# EAGLE board relaxationoscillator-v1 (EAGLE 8.7.1)
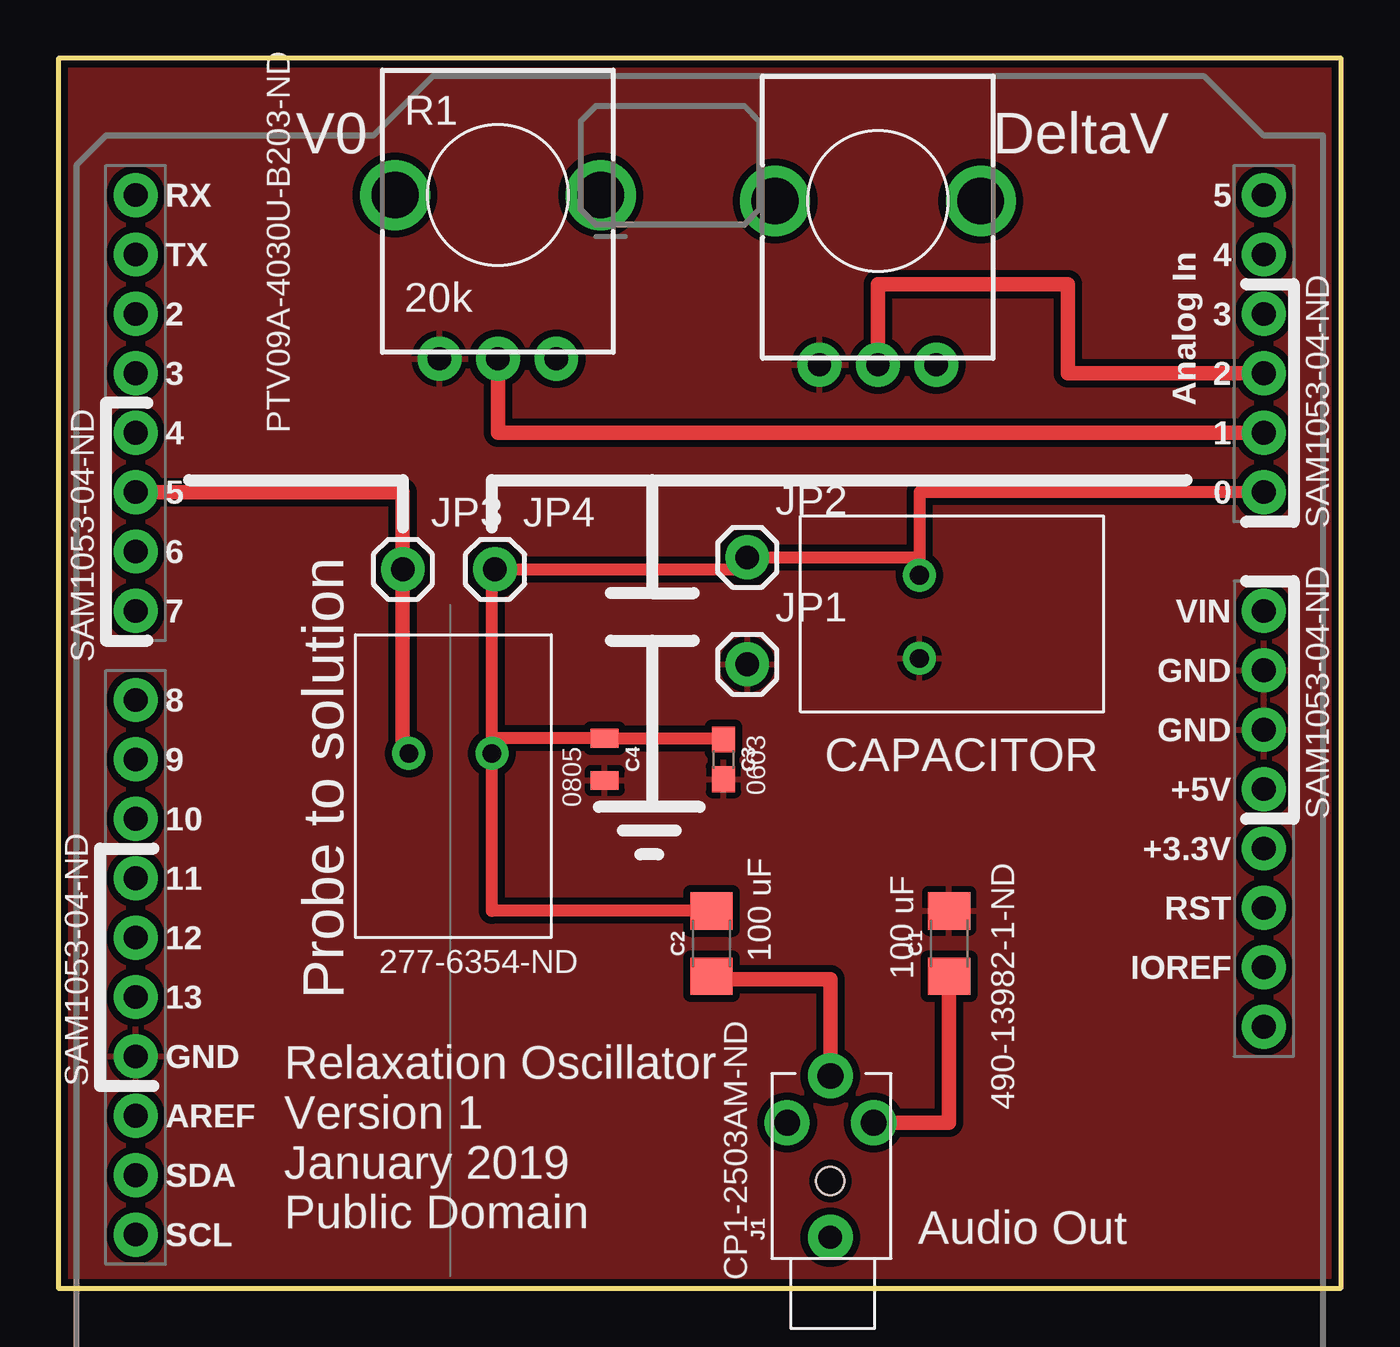
[diagram p0: board, top side]
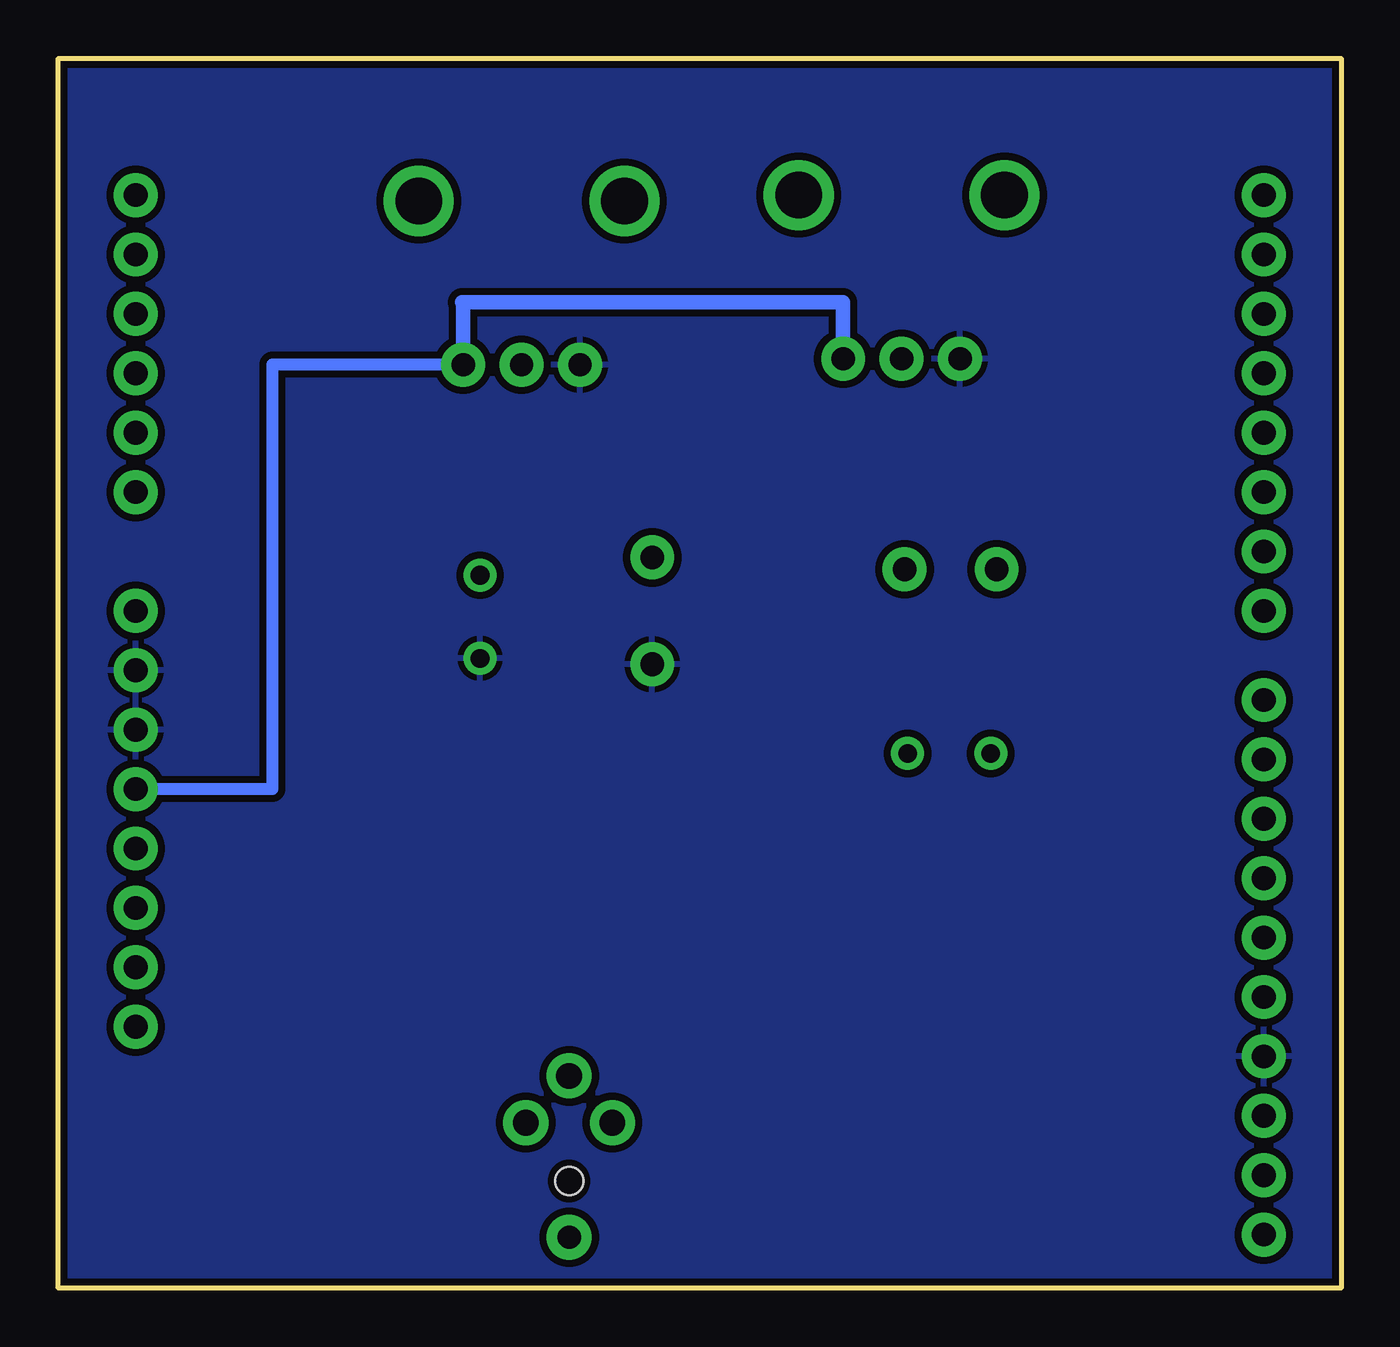
[diagram p1: board, bottom side, seen from below]

Size 54.86 x 52.58 mm. Coordinates in mm from the lower left corner, seen from the top.
Outline: 0,52.58 0,0 54.86,0 54.86,52.58 0,52.58
Copper layers (1*16): Top 0.035mm / dielectric 1.5mm / Bottom 0.035mm
Design rules "default": minimum track width 8mil, minimum drill 20mil, track to track 8mil, track to pad 8mil, pad to pad 8mil, via to via 8mil, smd to smd 8mil, copper to edge 10mil, drill to drill 8mil, minimum pad ring 12mil, minimum via ring 10mil, stop-mask expansion 4mil, vias tented up to drill 25mil, thermal gap 10mil
Net classes: 0 default: width 0.203 mm; 1 vcc: width 0.254 mm

## Footprints (pad centres in the part's own frame; a part is rotated, then mirrored left to right if it is on the bottom)
1206 = smd 1.6 x 1.8: 1 -1.4,0; 2 1.4,0
0603 = smd 1.1 x 1: 1 -0.85,0; 2 0.85,0
0805 = smd 0.8 x 1.2: 1 -0.9,0; 2 0.9,0
STEREOJACK2.5MM_STEREOJACK2.5MM = drill 1.1 pad 1.93: RING1 2.5,-1.85; RING2 2.5,1.85; TIP 4.5,0 | drill 1 pad 1.93: SHIELD -2.4,0 | hole 1.2: 0,0
1X01 = drill 1.016 pad 1.88: 1 0,0
ALPS_POT_KIT = drill 1 pad 1.88: P$1 7,-2.5; P$2 7,0; P$3 7,2.5 | drill 2: P$4 0,-4.4; P$5 0,4.4
UNO_R3_SHIELD = drill 1.016 pad 1.88: 3.3V 50.8,26.67; 5V 50.8,29.21; A0 50.8,41.91; A1 50.8,44.45; A2 50.8,46.99; A3 50.8,49.53; A4 50.8,52.07; A5 50.8,54.61; AREF 2.54,15.24; D2 2.54,49.53; D3 2.54,46.99; D4 2.54,44.45; D5 2.54,41.91; D6 2.54,39.37; D7 2.54,36.83; D8 2.54,33.02; D9 2.54,30.48; D10 2.54,27.94; D11 2.54,25.4; D12 2.54,22.86; D13 2.54,20.32; GND@0 50.8,31.75; GND@1 50.8,34.29; GND@2 2.54,17.78; IOREF 50.8,21.59; NC 50.8,19.05; RES 50.8,24.13; RX 2.54,54.61; SCL 2.54,10.16; SDA 2.54,12.7; TX 2.54,52.07; VIN 50.8,36.83
SPRING-TERMINAL = drill 0.8: P$1 5.08,1.778; P$2 5.08,5.334

## Placement (x,y rotation side)
C1  10uF  [1206]  38.1,14.73 90 top
C2  10uF  [1206]  27.94,14.73 90 top
C3  1.0uF  [0603]  28.45,22.61 270 top
C4  1.0uF  [0805]  23.37,22.61 270 top
J1  [STEREOJACK2.5MM_STEREOJACK2.5MM]  33.02,4.57 90 top
JP1  M01PTH  [1X01]  29.46,26.67 0 top
JP2  M01PTH  [1X01]  29.46,31.24 0 top
JP3  M01PTH  [1X01]  14.73,30.73 0 top
JP4  M01PTH  [1X01]  18.67,30.73 0 top
R1  20k  [ALPS_POT_KIT]  18.8,46.74 270 top
R9  20k  [ALPS_POT_KIT]  35.05,46.48 270 top
U$1  ARDUINO_R3_SHIELD  [UNO_R3_SHIELD]  0.76,-7.87 0 top
X1  SPRING-TERMINAL  [SPRING-TERMINAL]  13.21,27.94 270 top
X2  SPRING-TERMINAL  [SPRING-TERMINAL]  31.75,25.15 0 top

## Library data of the parts
C1 C2 = SparkFun-Capacitors; PROD_ID: CAP-10057
C3 = SparkFun-Capacitors; PROD_ID: CAP-00868
C4 = SparkFun-Capacitors; PROD_ID: CAP-11625
J1 = SparkFun-Connectors; PROD_ID: CONN-09878
JP1-JP4 = SparkFun-Connectors
R1 R9 = SparkFun-Electromechanical
U$1 = SparkFun-Boards
X1 X2 = spietz-library

## Nets
5V: R1.P$3 R9.P$3 U$1.5V
GND: C1.2 C3.2 C4.2 JP1.1 R1.P$1 R9.P$1 U$1.GND@0 U$1.GND@1 U$1.GND@2 X2.P$1
N$1: C2.2 C3.1 C4.1 JP2.1 JP4.1 U$1.A0 X1.P$2 X2.P$2
N$4: JP3.1 U$1.D5 X1.P$1
N$5: C1.1 J1.RING1
N$6: R1.P$2 U$1.A1
N$7: C2.1 J1.TIP
N$28: R9.P$2 U$1.A2

## Tracks (layer width: path | path; a pad name or v marks a point on that pad's centre or on a via)
5V
  Bottom 0.508: R9.P$3 45.72,39.48 45.72,21.34 U$1.5V
  Bottom 0.61: R1.P$3 21.3,42.16 37.55,42.16 | 37.59,42.16 37.55,42.16 | 37.55,42.16 R9.P$3
GND
  pour Top (isolate 0.305): 0,52.58 54.86,52.58 54.86,0.25 0,0
  pour Bottom (isolate 0.305): 0,52.58 54.86,52.58 54.86,0 0,0
N$1
  Top 0.508: U$1.A0 36.83,34.04 X2.P$2 36.83,31.24 JP2.1 29.46,30.73 JP4.1 18.54,30.73 18.54,23.62 18.54,23.51 | C2.2 18.54,16.13 X1.P$2 18.54,23.51 | C3.1 28.45,23.51 C4.1 18.54,23.51
N$4
  Top 0.61: U$1.D5 14.73,34.04 JP3.1 14.73,22.86 X1.P$1
N$5
  Top 0.61: J1.RING1 38.1,7.07 C1.1
N$6
  Top 0.61: U$1.A1 18.8,36.58 R1.P$2
N$7
  Top 0.61: J1.TIP 33.02,13.21 27.94,13.21 C2.1
N$28
  Top 0.61: U$1.A2 43.18,39.12 43.18,42.93 35.05,42.93 R9.P$2

## Text on the board
tPlace: V0 | DeltaV | SAM1053-04-ND | PTV09A-4030U-B203-ND | SAM1053-04-ND | Probe to solution | CAPACITOR | 0805 | 0603 | SAM1053-04-ND | 100 uF | 277-6354-ND | 100 uF | CP1-2503AM-ND | SAM1053-04-ND | 490-13982-1-ND | Relaxation Oscillator / Version 1 / January 2019 / Public Domain | Audio Out
tValues: Tent Vias! | Arduino Wee v1.3